# Altium PCB Banker_VHDCI_2_EDGE _BUF.PCBDOC (part 2 of 2)
Units mm, origin at the board's own origin, x right, y up, seen from the top; angles counter-clockwise.
Board outline 45 x 72.8 mm, 2 copper layers (Top, Bot), stack 1.571 mm thick; 106 components, 110 nets, 426 pads, 220 vias.
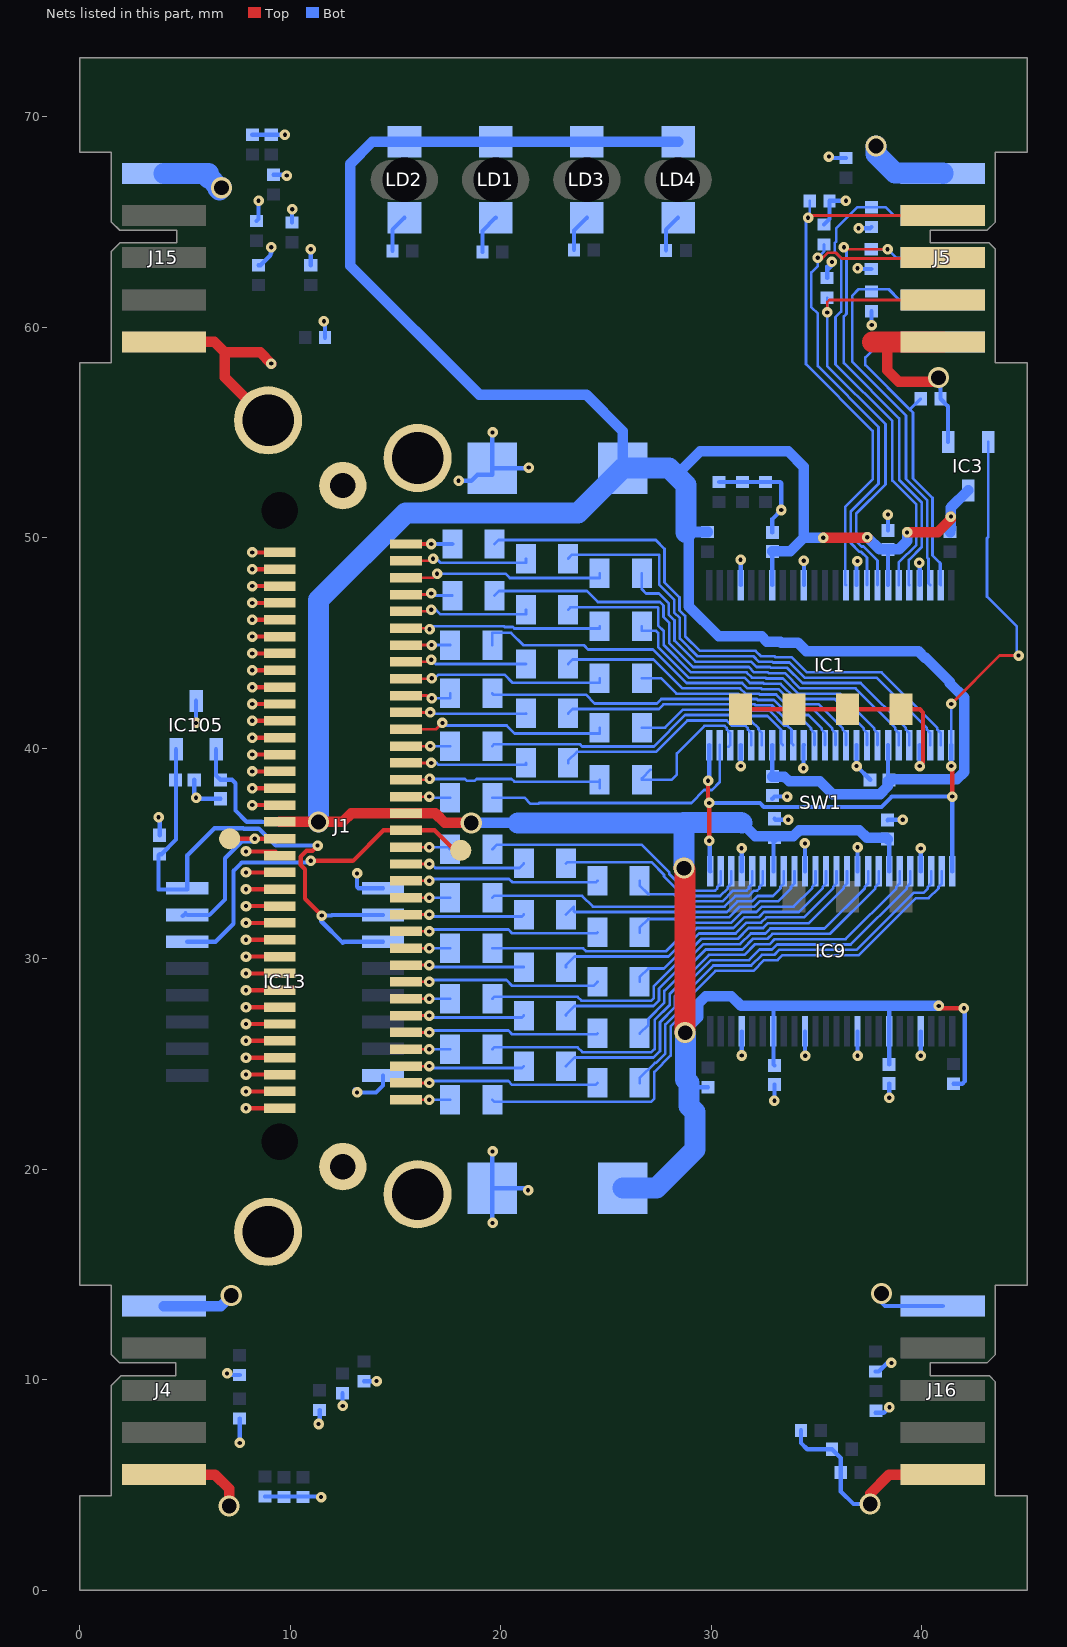
[diagram p2: the nets of this part, all layers, seen from the top]

## Via types
v1: diameter 0.5, hole 0.2, Top to Bot, tented both sides, 209 vias
v2: diameter 1, hole 0.7, Top to Bot, tented both sides, 11 vias

## Nets (pads, with @x,y where several pads share a name; then routed paths per layer and width w, separated by ;. In a path a pad name is that pad's centre, name@x,y a point inside that pad or via, vN(x,y) a via of type N, cw(c..) or ccw(c..) an arc to the next point about the centre after c; other vN are vias at no path point) (continued)
EDGE3_DIO1: IC1.14 J5.2 R23.1 | length 26.6
  Top w0.127: v1(34.6,65.2) 34.7,65.3 J5.2@41,65.3
  Bot w0.127: R23.1@34.681,66 34.681,65.262 34.502,65.083 34.502,58.243 37.67,55.076 37.67,52.77 36.371,51.471 36.371,47.779 IC1.14@36.4,47.75
EDGE3_DIO2: IC1.16 J5.3 R25.1 | length 24.9
  Top w0.127: v1(35.06,63.3) 35.1,63.26 35.267,63.26 35.548,63.541 35.912,63.541 36.193,63.26 40.96,63.26 J5.3@41,63.3
  Bot w0.127: R25.1@35.358,63.93 35.358,63.599 v1(35.06,63.3) 35.06,62.9 34.756,62.597 34.756,60.944 35.06,60.64 35.06,58.148 37.946,55.262 37.946,52.562 36.625,51.242 36.625,49.737 37.032,49.33 37.125,49.33 37.4,49.055 IC1.16@37.4,47.75
EDGE3_DIO3: IC1.17 J5.4 R27.1 | length 21.9
  Top w0.127: v1(35.505,60.7) 35.505,61.184 35.611,61.289 40.989,61.289 J5.4@41,61.3
  Bot w0.127: R27.1@35.505,61.4 v1(35.505,60.7) 35.505,58.165 38.273,55.397 38.273,52.53 36.879,51.136 36.879,49.842 37.137,49.584 37.23,49.584 37.9,48.915 IC1.17@37.9,47.75
EDGE3_DIO4: IC1.19 J5.7 R29.1 | length 24.8
  Bot w0.127: IC1.19@38.901,47.751 38.901,48.817 39.744,49.661 39.744,51.575 38.6,52.719 38.6,55.532 35.9,58.232 35.9,60.472 36.171,60.742 36.171,63.282 35.859,63.594 35.859,63.988 35.94,64.069 35.94,64.7 36.941,65.7 R29.1@37.607,65.7 38.273,65.7 38.673,65.3 J5.7@41,65.3
EDGE3_DIO5: IC1.20 J5.8 R31.1 | length 23.6
  Top w0.127: v1(36.3,63.8) 36.3,63.795 36.395,63.7 v1(38.375,63.7)
  Bot w0.127: v1(36.3,63.8) 36.425,63.675 36.425,60.637 36.295,60.507 36.295,58.3 38.927,55.668 38.927,52.751 39.998,51.68 39.998,49.556 39.382,48.939 39.382,47.769 IC1.20@39.4,47.75 ; R31.1@37.6,63.7 v1(38.375,63.7) 38.775,63.3 J5.8@41,63.3
EDGE3_DIO6: IC1.22 J5.9 R33.1 | length 19.9
  Bot w0.127: IC1.22@40.4,47.75 40.316,47.835 40.316,48.992 40.252,49.055 40.252,51.785 39.254,52.783 39.254,55.803 36.689,58.368 36.689,61.489 37,61.8 38.43,61.8 38.93,61.3 J5.9@41,61.3
EDGE3_DIO7: IC1.23 J5.10 R34.1 | length 18.1
  Bot w0.127: R34.1@39.95,56.6 39.45,56.1 39.42,56.1 ; J5.10@41,59.3 38.051,59.3 37.32,58.568 37.32,58.2 39.42,56.1 ; 39.42,56.1 39.581,55.939 39.581,52.819 40.506,51.894 40.506,49.16 40.849,48.817 ; 40.849,48.817 40.9,48.767 IC1.23@40.9,47.75 40.849,47.801 40.849,48.817
GND: C1.1 C2.1 C3.2 C4.1 C5.1 C6.1 C7.2 C8.1 C9.1 C10.1 C37.1 C297.1 C298.1 IC1.4 IC1.10 IC1.15 IC1.21 IC1.28 IC1.34 IC1.39 IC1.45 IC3.1 IC9.4 IC9.10 IC9.15 IC9.21 IC9.28 IC9.34 IC9.39 IC9.45 IC13.1 IC13.8 IC105.3 J1.35 J1.36 J1.37 J1.38 J1.39 J1.40 J1.41 J1.42 J1.43 J1.44 J1.45 J1.46 J1.47 J1.48 J1.49 J1.50 J1.53 J1.54 J1.55 J1.56 J1.57 J1.58 J1.59 J1.60 J1.61 J1.62 J1.63 J1.64 J1.65 J1.66 J1.67 J1.68 J1.69 J1.70 J1.71 J1.72 J1.73 J1.74 J4.5 J4.6 J5.5 J5.6 J15.5 J15.6 J16.5 J16.6 R3.2 R4.2 R5.2 R6.2 R7.2 R8.2 R9.2 R10.2 R11.2 R12.2 R13.2 R14.2 R15.2 R16.2 R17.2 R18.2 R19.2 R20.2 R21.2 R22.2 R23.2 R24.2 R25.2 R26.2 R27.2 R28.2 R29.2 R30.2 R31.2 R32.2 R33.2 R34.2 SW1.5 SW1.6 SW1.7 SW1.8 | length 173.7
  Top w0.2: v1(7.9,22.9) J1.35@9.5,22.9 ; v1(7.9,23.7) J1.36@9.5,23.7 ; v1(7.9,24.5) J1.37@9.5,24.5 ; v1(7.9,25.3) J1.38@9.5,25.3 ; v1(7.9,26.1) J1.39@9.5,26.1 ; v1(7.9,26.9) J1.40@9.5,26.9 ; v1(7.9,27.7) J1.41@9.5,27.7 ; v1(7.9,28.5) J1.42@9.5,28.5 ; v1(7.9,29.3) J1.43@9.5,29.3 ; v1(7.9,30.1) J1.44@9.5,30.1 ; v1(7.9,30.9) J1.45@9.5,30.9 ; v1(7.9,31.7) J1.46@9.5,31.7 ; v1(7.9,32.5) J1.47@9.5,32.5 ; v1(7.9,33.3) J1.48@9.5,33.3 ; v1(7.9,34.1) J1.49@9.5,34.1 ; v1(7.9,35.1) 9.3,35.1 J1.50@9.5,34.9 ; v1(8.2,37.3) J1.53@9.5,37.3 ; v1(8.2,38.1) J1.54@9.5,38.1 ; v1(8.2,38.9) J1.55@9.5,38.9 ; v1(8.2,39.7) J1.56@9.5,39.7 ; v1(8.2,40.5) J1.57@9.5,40.5 ; v1(8.2,41.3) J1.58@9.5,41.3 ; v1(8.2,42.1) J1.59@9.5,42.1 ; v1(8.2,42.9) J1.60@9.5,42.9 ; v1(8.2,43.7) J1.61@9.5,43.7 ; v1(8.2,44.5) J1.62@9.5,44.5 ; v1(8.2,45.3) J1.63@9.5,45.3 ; v1(8.2,46.1) J1.64@9.5,46.1 ; v1(8.2,46.9) J1.65@9.5,46.9 ; v1(8.2,47.7) J1.66@9.5,47.7 ; v1(8.2,48.5) J1.67@9.5,48.5 ; v1(8.2,49.3) J1.68@9.5,49.3 ; SW1.8@31.39,41.85 39.91,41.85 40.06,41.7 40.06,39.31 v1(39.9,39.15)
  Top w0.5: J4.5@4,5.5 6.425,5.5 7.1,4.825 v2(7.1,4) ; J15.5@4,59.3 6.4,59.3 6.9,58.8 ; J1.71@8.95,55.575 6.9,57.625 6.9,58.8 ; v1(9.1,58.27) 8.57,58.8 6.9,58.8 ; v2(37.55,4.1) 37.55,4.594 38.455,5.5 J16.5@41,5.5 ; 38.35,58.91 38.35,57.95 38.9,57.4 v2@40.6,57.4
  Top w1: 37.659,59.3 J5.5@41,59.3
  Bot w0.2: v1(3.75,36.72) 3.8,36.67 C37.1@3.8,35.866 ; C298.1@5.441,38.5 5.441,37.741 v1(5.531,37.65) 5.582,37.6 C297.1@6.691,37.6 ; v1(5.531,41.2) IC105.3@5.531,42.25 ; v1(7,10.3) 7.07,10.23 R10.2@7.6,10.23 ; v1(7.6,7) R12.2@7.6,8.16 ; R19.2@8.2,69.14 R20.2@9.1,69.14 v1(9.746,69.14) ; R22.2@8.4,65.04 8.5,65.14 v1(8.5,66) ; R24.2@8.5,62.94 8.591,62.94 9.069,63.418 9.069,63.503 9.1,63.534 v1(9.1,63.8) ; R16.2@8.8,4.46 11.437,4.46 v1(11.467,4.43) ; R26.2@9.2,67.24 9.796,67.24 v1(9.836,67.2) ; R28.2@10.081,64.97 10.081,65.581 v1(10.1,65.6) ; R30.2@10.975,62.94 v1(10.975,63.7) ; v1(11.347,7.9) 11.4,7.953 R6.2@11.4,8.56 ; v1(11.6,60.282) 11.655,60.227 R32.2@11.655,59.5 ; R4.2@12.488,9.36 12.488,8.768 v1(12.5,8.756) ; v1@13.05,23.775 v1(13.175,23.65) 14.08,23.65 14.411,23.981 IC13.8@14.411,24.457 ; v1(13.175,34.05) 13.175,33.42 13.249,33.347 IC13.1@14.411,33.347 ; R3.2@13.5,9.93 14.09,9.93 v1(14.1,9.94) ; v1(18,52.7) 18.6,52.7 18.89,52.99 19.6,52.99 C3.2@19.6,53.3 ; v1(19.609,17.45) 19.6,17.46 C7.2@19.6,19.1 ; v1(19.609,20.85) 19.6,20.841 C7.2@19.6,19.1 ; v1(19.609,55) 19.6,54.991 C3.2@19.6,53.3 ; v1(21.3,19) 21.2,19.1 C7.2@19.6,19.1 ; v1(21.331,53.33) 21.301,53.3 C3.2@19.6,53.3 ; R5.2@30.376,52.64 R7.2@31.476,52.64 R9.2@32.576,52.64 33.273,52.64 33.326,52.587 v1(33.326,51.315) 32.9,50.889 C2.1@32.9,50.25 ; v1(31.39,48.951) 31.4,48.941 IC1.4@31.4,47.75 ; v1(31.4,39.15) IC1.45@31.4,40.15 ; v1(31.442,35.25) 31.446,35.246 31.446,34.154 IC9.28@31.45,34.15 ; v1(31.45,25.403) IC9.21@31.45,26.55 ; C9.1@32.9,37.6 33,37.7 v1(33.6,37.7) ; v1(33,23.25) C10.1@33,24.03 ; C8.1@33,36.65 33.05,36.6 v1(33.66,36.6) ; R11.2@34.26,7.6 34.26,7 34.56,6.7 R17.2@35.73,6.7 36.15,6.28 R18.2@36.15,5.6 36.15,4.7 36.75,4.1 v2(37.55,4.1) ; v1(34.375,39.05) 34.387,39.063 34.387,40.138 IC1.39@34.4,40.15 ; v1(34.39,48.9) 34.4,48.89 IC1.10@34.4,47.75 ; IC9.15@34.45,26.55 34.45,25.403 v1(34.463,25.39) ; IC9.34@34.45,34.15 v1(34.45,35.475) ; R25.2@35.358,64.87 35.621,65.133 R23.2@35.621,66 v1(36.397,66) ; R27.2@35.505,62.34 35.505,62.884 35.59,62.8 35.73,62.94 v1(35.73,63.1) ; v1(35.59,68.1) 35.65,68.04 R21.2@36.397,68.04 ; IC1.34@36.9,40.15 v1(36.9,39.15) C4.1@37.55,38.5 ; IC1.15@36.9,47.75 36.9,48.849 v1(36.941,48.89) ; v1(36.95,25.39) IC9.10@36.95,26.55 ; IC9.39@36.95,34.15 v1(36.95,35.3) ; v1(36.95,62.8) 36.99,62.76 R31.2@37.6,62.76 ; v1(37,64.7) 37.547,64.7 R29.2@37.607,64.76 ; R33.2@37.607,60.76 37.607,60.112 v1(37.619,60.1) ; R15.2@37.8,8.43 38.191,8.43 v1(38.461,8.7) ; R13.2@37.8,10.4 37.958,10.4 38.358,10.8 v1(38.561,10.8) ; v2(38.091,14.1) 38.091,13.667 38.258,13.5 J16.6@41,13.5 ; C6.1@38.375,36.58 38.395,36.6 v1(39.1,36.6) ; v1(38.39,51.1) 38.4,51.09 C1.1@38.4,50.341 ; v1(38.45,23.4) C5.1@38.45,24.08 ; v1(39.875,48.81) 39.9,48.785 IC1.21@39.9,47.75 ; v1(39.9,39.15) IC1.28@39.9,40.15 ; v1(39.95,25.39) IC9.4@39.95,26.55 ; IC9.45@39.95,34.15 v1(39.95,35.242) ; v2@40.6,57.4 40.89,57.11 R34.2@40.89,56.6 41.25,56.24 IC3.1@41.25,54.55
  Bot w0.5: J4.6@4,13.5 6.7,13.5 v2(7.2,14)
  Bot w1: J15.6@4,67.3 6.123,67.3 6.123,67.077 6.18,67.077 6.577,66.68 6.577,66.583 6.637,66.523 v2(6.737,66.623) ; v2(37.828,68.6) 37.828,68.223 38.731,67.32 41,67.32 J5.6@41,67.3
  other v2: 40.791,57.6
NetJ1_1: J1.1 R126.2 | length 2.1
  Top w0.127: J1.1@15.5,23.3 v1(16.6,23.3)
  Bot w0.127: v1(16.6,23.3) R126.2@17.6,23.3
NetJ1_2: J1.2 R127.2 | length 9.2
  Top w0.127: J1.2@15.5,24.1 v1(16.6,24.1)
  Bot w0.127: v1(16.6,24.1) 16.701,24.1 16.791,24.191 20.365,24.191 20.546,24.01 24.509,24.01 R127.2@24.6,24.1
NetJ1_3: J1.3 R128.2 | length 5.7
  Top w0.127: J1.3@15.5,24.9 v1(16.6,24.9)
  Bot w0.127: v1(16.6,24.9) 16.701,24.9 16.791,24.81 21.009,24.81 R128.2@21.1,24.9
NetJ1_4: J1.4 R129.2 | length 2.1
  Top w0.127: J1.4@15.5,25.7 v1(16.6,25.7)
  Bot w0.127: v1(16.6,25.7) R129.2@17.6,25.7
NetJ1_5: J1.5 R130.2 | length 9.2
  Top w0.127: J1.5@15.5,26.5 v1(16.6,26.5)
  Bot w0.127: v1(16.6,26.5) 16.701,26.5 16.791,26.591 20.365,26.591 20.546,26.41 24.559,26.41 R130.2@24.6,26.45
NetJ1_6: J1.6 R131.2 | length 5.7
  Top w0.127: J1.6@15.5,27.3 v1(16.6,27.3)
  Bot w0.127: v1(16.6,27.3) 16.701,27.3 16.791,27.21 21.009,27.21 R131.2@21.1,27.3
NetJ1_7: J1.7 R132.2 | length 2.1
  Top w0.127: J1.7@15.5,28.1 v1(16.6,28.1)
  Bot w0.127: v1(16.6,28.1) R132.2@17.6,28.1
NetJ1_8: J1.8 R135.2 | length 9.3
  Top w0.127: J1.8@15.5,28.9 v1(16.6,28.9)
  Bot w0.127: v1(16.6,28.9) 16.701,28.9 16.791,28.991 20.265,28.991 20.546,28.71 24.409,28.71 R135.2@24.6,28.9
NetJ1_9: J1.9 R137.2 | length 5.6
  Top w0.127: J1.9@15.5,29.7 v1(16.6,29.7)
  Bot w0.127: v1(16.6,29.7) 16.701,29.7 16.791,29.61 21.09,29.61 R137.2@21.1,29.6
NetJ1_10: J1.10 R139.2 | length 2.1
  Top w0.127: J1.10@15.5,30.5 v1(16.6,30.5)
  Bot w0.127: v1(16.6,30.5) R139.2@17.6,30.5
NetJ1_11: J1.11 R141.2 | length 9.2
  Top w0.127: J1.11@15.5,31.3 v1(16.6,31.3)
  Bot w0.127: v1(16.6,31.3) 16.701,31.3 16.791,31.391 20.365,31.391 20.546,31.21 24.559,31.21 R141.2@24.6,31.25
NetJ1_12: J1.12 R143.2 | length 5.7
  Top w0.127: J1.12@15.5,32.1 v1(16.6,32.1)
  Bot w0.127: v1(16.6,32.1) 16.701,32.1 16.791,32.01 21.009,32.01 R143.2@21.1,32.1
NetJ1_13: J1.13 R145.2 | length 2.1
  Top w0.127: J1.13@15.5,32.9 v1(16.6,32.9)
  Bot w0.127: v1(16.6,32.9) R145.2@17.6,32.9
NetJ1_14: J1.14 R147.2 | length 9.2
  Top w0.127: J1.14@15.5,33.7 v1(16.6,33.7)
  Bot w0.127: v1(16.6,33.7) 16.701,33.7 16.791,33.791 20.39,33.791 20.546,33.635 24.535,33.635 R147.2@24.6,33.7
NetJ1_15: J1.15 R149.2 | length 5.8
  Top w0.127: J1.15@15.5,34.5 v1(16.6,34.5)
  Bot w0.127: v1(16.6,34.5) 16.701,34.5 16.891,34.31 20.884,34.31 R149.2@21.1,34.525
NetJ1_16: J1.16 R151.2 | length 2.1
  Top w0.127: J1.16@15.5,35.3 v1(16.6,35.3)
  Bot w0.127: v1(16.6,35.3) 17.5,35.3 R151.2@17.6,35.2
NetJ1_19: J1.19 R153.2 | length 2.1
  Top w0.127: J1.19@15.5,37.7 v1(16.6,37.7)
  Bot w0.127: v1(16.6,37.7) 16.65,37.65 R153.2@17.6,37.65
NetJ1_20: J1.20 R155.2 | length 9.7
  Top w0.127: J1.20@15.5,38.5 v1@16.622,38.5
  Bot w0.127: v1(16.622,38.55) 16.632,38.541 18.306,38.541 18.394,38.452 18.759,38.452 18.848,38.541 20.515,38.541 20.646,38.41 R155.2@24.7,38.41 ; R155.2@24.7,38.1 R155.2@24.7,38.41 ; R155.2@24.7,38.5 R155.2@24.7,38.41
NetJ1_21: J1.21 R157.2 | length 5.8
  Top w0.127: J1.21@15.5,39.3 v1@16.7,39.3
  Bot w0.127: v1(16.7,39.3) 16.955,39.3 17.046,39.21 21.2,39.21 R157.2@21.2,39.3
NetJ1_22: J1.22 R159.2 | length 2.1
  Top w0.127: J1.22@15.5,40.1 v1(16.65,40.1)
  Bot w0.127: v1(16.65,40.1) R159.2@17.6,40.1
NetJ1_23: J1.23 R161.2 | length 9.8
  Top w0.127: J1.23@15.5,40.9 16.927,40.9 v1(17.231,41.204)
  Bot w0.127: v1(17.231,41.204) 17.358,41.077 20.279,41.077 20.66,40.696 24.7,40.696 R161.2@24.7,40.975
NetJ1_24: J1.24 R163.2 | length 5.7
  Top w0.127: J1.24@15.5,41.7 v1(16.651,41.7)
  Bot w0.127: v1(16.651,41.7) 16.715,41.636 17.039,41.636 17.048,41.644 18.891,41.644 18.9,41.636 21.2,41.636 R163.2@21.2,41.65
NetJ1_25: J1.25 R165.2 | length 2.4
  Top w0.127: J1.25@15.5,42.5 16.494,42.5 16.622,42.372 v1(16.723,42.372)
  Bot w0.127: v1(16.723,42.372) 17.6,42.372 R165.2@17.6,42.6
NetJ1_26: J1.26 R171.2 | length 9.6
  Top w0.127: J1.26@15.5,43.3 v1@16.723,43.3
  Bot w0.127: v1(16.723,43.325) 16.881,43.325 17.046,43.491 20.186,43.491 20.567,43.11 24.7,43.11 R171.2@24.7,43.325
NetJ1_27: J1.27 R173.2 | length 5.8
  Top w0.127: J1.27@15.5,44.1 v1@16.7,44.1
  Bot w0.127: v1(16.7,44.2) 16.9,44 R173.2@21.2,44
NetJ1_28: J1.28 R175.2 | length 2.1
  Top w0.127: J1.28@15.5,44.9 v1(16.715,44.9)
  Bot w0.127: v1(16.715,44.9) R175.2@17.6,44.9
NetJ1_29: J1.29 R177.2 | length 9.4
  Top w0.127: J1.29@15.5,45.7 v1@16.622,45.7
  Bot w0.127: v1(16.622,45.65) 16.772,45.8 20.144,45.8 20.19,45.755 20.576,45.755 20.646,45.685 24.7,45.685 R177.2@24.7,45.8
NetJ1_30: J1.30 R179.2 | length 6
  Top w0.127: J1.30@15.5,46.5 v1@16.7,46.5
  Bot w0.127: v1(16.7,46.575) 16.931,46.575 17.146,46.36 21.2,46.36 R179.2@21.2,46.575
NetJ1_31: J1.31 R181.2 | length 2.2
  Top w0.127: J1.31@15.5,47.3 v1@16.7,47.3
  Bot w0.127: v1(16.7,47.35) 16.8,47.25 R181.2@17.7,47.25
NetJ1_32: J1.32 R183.2 | length 9.6
  Top w0.127: J1.32@15.5,48.1 16.786,48.1 v1(16.977,48.29)
  Bot w0.127: v1(16.977,48.29) 20.228,48.29 20.431,48.087 24.7,48.087 R183.2@24.7,48.3
NetJ1_33: J1.33 R185.2 | length 6
  Top w0.127: J1.33@15.5,48.9 v1@16.786,48.9
  Bot w0.127: v1(16.786,49) 16.956,49 17.146,48.81 21.2,48.81 R185.2@21.2,49
NetJ1_34: J1.34 R187.2 | length 2.2
  Top w0.2: J1.34@15.5,49.7 v1(16.7,49.7)
  Bot w0.2: v1(16.7,49.7) R187.2@17.7,49.7
NetLD1_1: LD1.1 R35.2 | length 1.9
  Bot w0.2: R35.2@19.13,63.575 19.13,64.572 LD1.1@19.758,65.2
NetLD2_1: LD2.1 R51.2 | length 1.8
  Bot w0.2: R51.2@14.855,63.625 14.855,64.63 LD2.1@15.425,65.2
NetLD3_1: LD3.1 R36.2 | length 1.8
  Bot w0.2: R36.2@23.48,63.675 23.48,64.588 LD3.1@24.092,65.2
NetLD4_1: LD4.1 R37.2 | length 1.8
  Bot w0.2: R37.2@27.855,63.65 27.855,64.63 LD4.1@28.425,65.2
P3V3: C37.2 C298.2 IC13.2 IC13.3 IC13.16 IC105.2 | length 27.9
  Top w0.2: v1(11.3,35.375) 11.052,35.127 10.777,35.127 10.498,34.848 10.498,34.453 10.7,34.251 10.7,32.85 v1(11.5,32.05)
  Bot w0.2: IC105.2@4.581,39.95 4.581,35.658 3.889,34.966 C37.2@3.8,34.966 3.75,34.916 3.75,33.295 IC13.16@5.111,33.295 ; IC13.16@5.111,33.347 5.111,34.911 6.4,36.2 7.773,36.2 7.796,36.177 8.51,36.177 9.312,35.375 v1(11.3,35.375) ; IC13.3@14.411,30.807 12.551,30.807 12.5,30.755 11.475,31.781 11.475,32.025 v1(11.5,32.05) 11.959,32.05 11.985,32.077 IC13.2@14.411,32.077
P5V0_VHDCI1: C1.2 C2.2 C3.1 C4.2 C5.2 C6.2 C7.1 C8.2 C9.2 C10.2 C297.2 IC1.7 IC1.18 IC1.31 IC1.42 IC3.3 IC9.7 IC9.18 IC9.31 IC9.42 IC105.1 J1.18 J1.52 LD1.2 LD2.2 LD3.2 LD4.2 R1.1 R2.1 R90.1 R91.1 | length 220.3
  Top w0.2: v1(40.805,27.756) 40.911,27.65 v1(42,27.65)
  Top w0.5: J1.52@9.5,36.5 v2(11.347,36.5) 12.5,36.5 12.9,36.9 16.9,36.9 17.35,36.45 v2@18.394,36.45 ; v1(35.32,50) 37.4,50 37.413,50.013 v1(37.413,50.025) ; v1(39.304,50.25) 40.75,50.25 41.382,50.882 v1(41.382,51)
  Top w1: v2(28.7,34.3) 28.763,34.237 v2(28.763,26.487)
  Bot w0.2: IC105.1@6.481,39.95 6.481,38.709 C297.2@6.691,38.5 7.235,38.5 7.4,38.335 7.4,37.035 7.931,36.504 8.646,36.504 8.65,36.5 v2(11.347,36.5) ; 28.777,24.262 28.94,24.099 29.146,23.893 R90.1@29.849,23.893 ; C9.2@32.9,38.65 IC1.42@32.9,40.15 ; IC1.7@32.9,47.75 C2.2@32.9,49.35 ; IC9.31@32.95,34.15 32.95,35.7 C8.2@33,35.75 ; C10.2@33,24.93 32.95,24.98 IC9.18@32.95,26.55 32.95,27.706 33,27.756 ; C6.2@38.375,35.68 38.45,35.605 IC9.42@38.45,34.15 ; 38.4,27.756 38.45,27.706 IC9.7@38.45,26.55 C5.2@38.45,24.98 ; IC1.31@38.4,40.15 38.4,38.55 C4.2@38.45,38.5 ; IC1.18@38.4,47.75 C1.2@38.4,49.441 ; R91.1@41.5,24.06 41.92,24.06 42.037,24.177 42.037,27.613 v1(42,27.65)
  Bot w0.5: v2@18.394,36.45 v2(18.6,36.45) 20.823,36.45 ; C3.1@25.8,53.3 25.8,55.061 24.061,56.8 18.975,56.8 12.85,62.925 12.85,67.75 13.9,68.8 LD2.2@15.425,68.8 LD1.2@19.758,68.8 LD3.2@24.092,68.8 LD4.2@28.425,68.8 ; 28.364,52.928 28.364,52.985 29.477,54.098 29.885,54.098 29.887,54.1 33.659,54.1 34.4,53.359 34.4,50 ; v2(28.763,26.487) 28.763,26.622 29.373,27.232 29.373,27.86 29.74,28.227 30.956,28.227 31.427,27.756 33,27.756 38.4,27.756 v1(40.805,27.756) ; R2.1@29.825,50.27 28.82,50.27 28.8,50.25 28.933,50.117 28.933,46.731 30.347,45.316 32.389,45.316 32.643,45.062 33.284,45.062 33.326,45.02 34.108,45.02 34.512,44.616 35.01,44.616 35.023,44.604 39.844,44.604 40.148,44.3 40.185,44.3 41.333,43.153 41.333,43.088 42.027,42.394 42.027,38.891 41.66,38.523 38.51,38.523 38.51,38.44 38.39,38.44 38.39,38.187 38.016,37.813 35.763,37.813 35.153,38.423 33.7,38.423 33.473,38.65 C9.2@32.9,38.65 ; 31.45,36.45 32.09,35.81 32.94,35.81 C8.2@33,35.75 33.06,35.81 33.898,35.81 34.19,36.102 37.035,36.102 37.397,35.74 38.315,35.74 C6.2@38.375,35.68 ; C2.2@32.9,49.35 33.75,49.35 34.4,50 ; v1(35.32,50) 34.4,50 ; v1(37.413,50.025) 37.997,49.441 C1.2@38.4,49.441 38.901,49.441 39.304,49.844 v1(39.304,50.25) ; R1.1@41.35,50.27 41.3,50.32 41.382,50.402 v1(41.382,51) 41.382,51.432 IC3.3@42.2,52.25
  Bot w1: v2(11.347,36.5) 11.347,47.037 15.488,51.179 23.679,51.179 C3.1@25.8,53.3 27.992,53.3 28.364,52.928 28.8,52.492 28.8,50.25 ; 20.823,36.45 28.65,36.45 ; C7.1@25.8,19.1 27.39,19.1 29.226,20.936 29.226,22.728 28.94,23.013 28.94,24.099 ; v2(28.7,34.3) 28.7,36.4 28.65,36.45 ; v2(28.763,26.487) 28.777,26.473 28.777,24.262 ; 31.45,36.45 31.423,36.477 28.677,36.477 28.65,36.45
RESET: IC1.25 IC1.48 IC3.2 IC9.25 IC9.48 | length 40.8
  Top w0.127: v1(41.4,42.102) 43.698,44.4 v1(44.6,44.4)
  Top w0.2: v1(29.846,38.452) 29.846,37.254 29.9,37.2 v1(29.9,35.6) ; v1(41.4,39.15) 41.45,39.1 v1(41.45,37.7)
  Bot w0.127: IC1.25@41.4,40.15 v1(41.4,42.102) ; IC3.2@43.15,54.55 43.15,50.035 43.1,49.985 43.1,47.2 44.505,45.795 44.505,44.494 v1(44.6,44.4)
  Bot w0.2: v1(29.846,38.452) 29.9,38.506 IC1.48@29.9,40.15 ; v1(29.9,35.6) 29.925,35.575 29.925,34.175 IC9.25@29.95,34.15 ; v1(29.9,37.4) 32.309,37.4 32.496,37.213 38.091,37.213 38.578,37.7 v1(41.45,37.7) IC9.48@41.45,34.15 ; v1(41.4,39.15) IC1.25@41.4,40.15
VHDCI1_5V_DIO0: IC9.47 R126.1 | length 28.2
  Bot w0.127: R126.1@19.6,23.3 19.69,23.21 27.154,23.21 27.296,23.352 27.296,24.624 28.073,25.401 28.073,26.773 28.79,27.49 28.79,28.012 30.202,29.425 32.002,29.425 32.51,29.933 33.147,29.933 33.382,30.167 37.01,30.167 39.721,32.879 40.323,32.879 40.791,33.346 40.791,33.416 40.95,33.575 IC9.47@40.95,34.15
VHDCI1_5V_DIO1: IC9.46 R127.1 | length 19.6
  Bot w0.127: R127.1@26.6,24.1 26.6,24.325 27.326,25.052 27.364,25.052 27.819,25.506 27.819,26.878 28.536,27.595 28.536,28.118 30.097,29.679 31.897,29.679 32.405,30.187 32.992,30.187 33.227,30.421 36.905,30.421 39.616,33.133 40.077,33.133 40.29,33.346 40.29,33.416 40.45,33.575 IC9.46@40.45,34.15
VHDCI1_5V_DIO2: IC9.44 R128.1 | length 21.7
  Bot w0.127: R128.1@23.1,24.9 23.505,25.306 27.259,25.306 27.565,25.611 27.565,26.983 28.282,27.7 28.282,28.223 29.991,29.933 31.791,29.933 32.299,30.441 32.887,30.441 33.121,30.675 36.62,30.675 39.29,33.346 39.29,33.416 39.45,33.575 IC9.44@39.45,34.15
VHDCI1_5V_DIO3: IC9.43 R129.1 | length 24.5
  Bot w0.127: R129.1@19.6,25.7 19.69,25.791 23.654,25.791 23.885,25.56 27.154,25.56 27.311,25.716 27.311,27.089 28.028,27.806 28.028,28.328 29.886,30.187 31.582,30.187 32.09,30.695 32.781,30.695 33.016,30.929 36.374,30.929 38.791,33.346 38.791,33.416 38.95,33.575 IC9.43@38.95,34.15
VHDCI1_5V_DIO4: IC9.41 R130.1 | length 15.4
  Bot w0.127: R130.1@26.6,26.45 27.012,26.862 27.012,27.149 27.774,27.911 27.774,28.476 29.738,30.441 31.477,30.441 31.985,30.949 32.676,30.949 32.911,31.183 35.628,31.183 37.791,33.346 37.791,33.416 37.95,33.575 IC9.41@37.95,34.15
VHDCI1_5V_DIO5: IC9.40 R131.1 | length 17.9
  Bot w0.127: R131.1@23.1,27.3 23.1,27.344 23.511,27.756 27.259,27.756 27.52,28.016 27.52,28.581 29.633,30.695 31.372,30.695 31.88,31.203 32.571,31.203 32.806,31.437 35.382,31.437 37.29,33.346 37.29,33.416 37.45,33.575 IC9.40@37.45,34.15
VHDCI1_5V_DIO6: IC9.38 R132.1 | length 20.2
  Bot w0.127: R132.1@19.6,28.1 19.69,28.191 23.654,28.191 23.835,28.01 27.154,28.01 27.266,28.121 27.266,28.686 29.528,30.949 31.267,30.949 31.775,31.457 32.466,31.457 32.701,31.691 34.636,31.691 36.29,33.346 36.29,33.416 36.45,33.575 IC9.38@36.45,34.15
VHDCI1_5V_DIO7: IC9.37 R135.1 | length 12
  Bot w0.127: R135.1@26.6,28.9 26.6,29.125 27.012,29.537 27.757,29.537 29.423,31.203 31.161,31.203 31.669,31.711 32.361,31.711 32.615,31.965 34.409,31.965 35.791,33.346 35.791,33.416 35.95,33.575 IC9.37@35.95,34.15
VHDCI1_5V_DIO8: IC9.36 R137.1 | length 14.7
  Bot w0.127: R137.1@23.1,29.6 23.1,29.694 23.511,30.106 27.967,30.106 29.318,31.457 31.056,31.457 31.564,31.965 32.255,31.965 32.509,32.219 34.163,32.219 35.29,33.346 35.29,33.416 35.45,33.575 IC9.36@35.45,34.15
VHDCI1_5V_DIO9: IC9.35 R139.1 | length 17.4
  Bot w0.127: R139.1@19.6,30.5 19.609,30.491 23.915,30.491 24.046,30.36 27.861,30.36 29.212,31.711 30.951,31.711 31.459,32.219 32.15,32.219 32.404,32.473 33.917,32.473 34.791,33.346 34.791,33.416 34.95,33.575 IC9.35@34.95,34.15
VHDCI1_5V_DIO10: IC9.33 R141.1 | length 9.1
  Bot w0.127: R141.1@26.6,31.25 26.6,31.475 27.012,31.887 28.972,31.887 29.05,31.965 30.846,31.965 31.354,32.473 32.045,32.473 32.299,32.727 33.171,32.727 33.791,33.346 33.791,33.416 33.95,33.575 IC9.33@33.95,34.15
VHDCI1_5V_DIO11: IC9.32 R143.1 | length 11.9
  Bot w0.127: R143.1@23.1,32.1 23.472,32.473 23.472,32.258 23.511,32.219 30.741,32.219 31.249,32.727 31.94,32.727 32.194,32.981 32.925,32.981 33.291,33.346 33.291,33.416 33.45,33.575 IC9.32@33.45,34.15
VHDCI1_5V_DIO12: IC9.30 R145.1 | length 14.2
  Bot w0.127: R145.1@19.6,32.9 19.69,32.991 23.865,32.991 24.383,32.473 30.635,32.473 31.143,32.981 31.784,32.981 32.038,33.235 32.179,33.235 32.291,33.346 32.291,33.416 32.45,33.575 IC9.30@32.45,34.15
VHDCI1_5V_DIO13: IC9.29 R147.1 | length 6.9
  Bot w0.127: R147.1@26.6,33.7 26.6,33.475 27.011,33.064 28.241,33.064 28.578,32.727 30.53,32.727 31.038,33.235 31.679,33.235 31.79,33.346 31.79,33.416 31.95,33.575 IC9.29@31.95,34.15
VHDCI1_5V_DIO14: IC9.27 R149.1 | length 9.5
  Bot w0.127: R149.1@23.1,34.525 23.165,34.591 27.154,34.591 27.755,33.989 27.755,33.909 28.683,32.981 30.425,32.981 30.79,33.346 30.79,33.416 30.95,33.575 IC9.27@30.95,34.15
VHDCI1_5V_DIO15: IC9.26 R151.1 | length 12.6
  Bot w0.127: R151.1@19.6,35.2 19.816,35.416 26.688,35.416 28.009,34.094 28.009,34.014 28.789,33.235 30.179,33.235 30.291,33.346 30.291,33.416 30.45,33.575 IC9.26@30.45,34.15
VHDCI1_5V_DIO16: IC1.47 R153.1 | length 13.1
  Bot w0.127: R153.1@19.6,37.65 21.127,37.65 21.418,37.36 21.782,37.36 21.823,37.4 29.052,37.4 29.664,38.011 30.029,38.011 30.4,38.383 IC1.47@30.4,40.15
VHDCI1_5V_DIO17: IC1.46 R155.1 | length 7.4
  Bot w0.127: R155.1@27.112,38.981 26.7,38.569 R155.1@26.7,38.5 28.113,38.5 28.363,38.751 28.363,39.758 29.671,41.066 30.629,41.066 30.74,40.954 30.74,40.885 30.9,40.725 IC1.46@30.9,40.15 IC1.46@30.814,40.064
VHDCI1_5V_DIO18: IC1.44 R157.1 | length 10.5
  Bot w0.127: R157.1@23.2,39.3 23.2,39.419 23.611,39.831 27.375,39.831 28.864,41.32 30.734,41.32 30.988,41.066 31.629,41.066 31.74,40.954 31.74,40.885 31.9,40.725 IC1.44@31.9,40.15
VHDCI1_5V_DIO19: IC1.43 R159.1 | length 14.5
  Bot w0.127: R159.1@19.6,40.1 19.691,40.191 23.754,40.191 23.86,40.085 27.269,40.085 28.759,41.574 30.839,41.574 31.093,41.32 31.734,41.32 31.776,41.278 31.917,41.278 32.241,40.954 32.241,40.885 32.4,40.725 IC1.43@32.4,40.15
VHDCI1_5V_DIO20: IC1.41 R161.1 | length 8.1
  Bot w0.127: R161.1@26.7,40.975 27.801,40.975 28.653,41.828 30.945,41.828 31.199,41.574 31.839,41.574 31.881,41.532 32.663,41.532 33.313,40.881 33.313,40.237 IC1.41@33.4,40.15
VHDCI1_5V_DIO21: IC1.40 R163.1 | length 12.1
  Bot w0.127: R163.1@23.2,41.65 23.416,41.866 27.517,41.866 27.733,42.082 31.05,42.082 31.304,41.828 31.945,41.828 31.986,41.786 32.768,41.786 33.488,41.066 33.629,41.066 33.814,40.881 33.814,40.237 IC1.40@33.9,40.15
VHDCI1_5V_DIO22: IC1.38 R165.1 | length 16.9
  Bot w0.127: R165.1@19.6,42.6 19.66,42.541 24.04,42.541 24.461,42.12 27.412,42.12 27.628,42.336 31.155,42.336 31.409,42.082 32.05,42.082 32.092,42.04 32.873,42.04 33.593,41.32 34.375,41.32 34.74,40.954 34.74,40.885 34.9,40.725 IC1.38@34.9,40.15
VHDCI1_5V_DIO23: IC1.37 R171.1 | length 10.4
  Bot w0.127: R171.1@26.7,43.325 27.607,43.325 28.343,42.59 31.26,42.59 31.514,42.336 32.155,42.336 32.197,42.294 32.979,42.294 33.699,41.574 34.621,41.574 35.241,40.954 35.241,40.885 35.4,40.725 IC1.37@35.4,40.15
VHDCI1_5V_DIO24: IC1.36 R173.1 | length 14.9
  Bot w0.127: R173.1@23.2,44 23.416,44.216 27.254,44.216 28.626,42.844 31.365,42.844 31.619,42.59 32.26,42.59 32.302,42.548 33.084,42.548 33.804,41.828 34.867,41.828 35.74,40.954 35.74,40.885 35.9,40.725 IC1.36@35.9,40.15
VHDCI1_5V_DIO25: IC1.35 R175.1 | length 20
  Bot w0.127: R175.1@19.6,44.9 19.6,45.48 20.492,45.48 21.081,44.891 23.95,44.891 24.155,44.686 27.236,44.686 28.824,43.098 31.471,43.098 31.725,42.844 32.365,42.844 32.407,42.802 33.189,42.802 33.909,42.082 35.113,42.082 36.241,40.954 36.241,40.885 36.4,40.725 IC1.35@36.4,40.15
VHDCI1_5V_DIO26: IC1.33 R177.1 | length 13.9
  Bot w0.127: R177.1@26.7,45.8 26.7,45.575 27.375,45.575 27.49,45.46 27.49,44.791 28.929,43.352 31.576,43.352 31.83,43.098 32.471,43.098 32.513,43.056 33.294,43.056 34.014,42.336 35.859,42.336 37.241,40.954 37.241,40.885 37.4,40.725 IC1.33@37.4,40.15
VHDCI1_5V_DIO27: IC1.32 R179.1 | length 18.7
  Bot w0.127: R179.1@23.2,46.575 23.315,46.691 27.45,46.691 27.476,46.664 27.476,45.833 27.744,45.566 27.744,44.897 29.034,43.606 31.681,43.606 31.935,43.352 32.576,43.352 32.618,43.31 33.399,43.31 34.119,42.59 36.105,42.59 37.74,40.954 37.74,40.885 37.9,40.725 IC1.32@37.9,40.15
VHDCI1_5V_DIO28: IC1.30 R181.1 | length 23.6
  Bot w0.127: R181.1@19.7,47.25 19.916,47.466 24.09,47.466 24.611,46.945 27.555,46.945 27.73,46.77 27.73,46.233 27.998,45.966 27.998,45.002 29.139,43.86 31.786,43.86 32.04,43.606 32.681,43.606 32.723,43.564 33.505,43.564 34.225,42.844 36.851,42.844 38.741,40.954 38.741,40.885 38.9,40.725 IC1.30@38.9,40.15
VHDCI1_5V_DIO29: IC1.29 R183.1 | length 17.8
  Bot w0.127: R183.1@26.7,48.3 26.7,47.55 26.9,47.35 27.509,47.35 27.984,46.875 27.984,46.338 28.252,46.071 28.252,45.107 29.245,44.114 31.891,44.114 32.145,43.86 32.786,43.86 32.828,43.818 33.61,43.818 34.33,43.098 37.097,43.098 39.241,40.954 39.241,40.885 39.4,40.725 IC1.29@39.4,40.15
VHDCI1_5V_DIO30: IC1.27 R185.1 | length 23.1
  Bot w0.127: R185.1@23.2,49 23.391,49.191 27.51,49.191 27.529,49.172 27.529,49.043 ; 27.528,49.043 27.528,47.769 28.238,47.059 28.238,46.443 28.506,46.176 28.506,45.212 29.35,44.368 31.997,44.368 32.251,44.114 32.891,44.114 32.933,44.072 33.715,44.072 34.435,43.352 37.843,43.352 40.24,40.954 40.24,40.885 40.4,40.725 IC1.27@40.4,40.15
VHDCI1_5V_DIO31: IC1.26 R187.1 | length 27.6
  Bot w0.127: R187.1@19.7,49.7 19.89,49.891 27.364,49.891 27.783,49.472 27.783,48.938 ; 27.782,48.938 27.782,47.874 28.492,47.164 28.492,46.548 28.76,46.281 28.76,45.317 29.455,44.622 32.102,44.622 32.356,44.368 32.997,44.368 33.039,44.326 33.82,44.326 34.54,43.606 38.089,43.606 40.741,40.954 40.741,40.885 40.9,40.725 IC1.26@40.9,40.15
VHDCI1_SCL: B11.1 IC13.14 J1.17 | length 17
  Top w0.2: v1(10.975,34.65) 12.975,34.65 14.425,36.1 J1.17@15.5,36.1 16.85,36.1 17.8,35.15 B11.1@18.1,35.15
  Bot w0.2: IC13.14@5.111,30.807 6.445,30.807 7.3,31.662 7.3,34.175 7.702,34.577 10.902,34.577 v1(10.975,34.65)
VHDCI1_SDA: B12.1 IC13.15 J1.51 | length 8.4
  Top w0.2: B12.1@7.125,35.7 v1(8.313,35.7) J1.51@9.5,35.7
  Bot w0.2: IC13.15@4.898,32.025 IC13.15@5.03,32.157 ; IC13.15@5.111,32.077 6.158,32.077 6.9,32.819 6.9,34.775 7.702,35.577 8.189,35.577 v1(8.313,35.7)
pads on no net: IC13.9 IC13.10 IC13.11 IC13.12 IC13.13 J1.75 LD1.3 LD2.3 LD3.3 LD4.3

## Polygon pours and split planes (outlines as drawn)
GND on Top "Top-GND" (solid, remove dead copper, shelved, pour order 0): 0.2,72.6 44.8,72.6 44.8,68.5 43.305,68.5 43.3,68.495 43.3,58.1 44.8,58.1 44.8,0.2 0.2,0.2
GND on Bot "Bot-GND" (solid, remove dead copper, shelved, pour order 2): 0,72.8 45,72.8 45,0 44.9,0.1 0,0.1

## Keep-outs
Top:
  lines w0.1: 0,0.9 33.7,0.9 ; 0,71.9 33.7,71.9 ; 11.227,0.9 44.927,0.9 ; 11.227,71.9 44.927,71.9
Bot:
  lines w0.1: 0,2.65 33.35,2.65 ; 0,70.15 33.65,70.15 ; 11.227,2.65 44.577,2.65 ; 11.227,70.15 44.877,70.15
KeepOutLayer:
  lines w0.1: 0,43.8 0,14.5 ; 0,53.8 0,58.3 5.7,58.3 ; 1.5,4.5 0,4.5 ; 3.77,6.254 4.37,6.254 ; 5.7,60.1 5.7,60.5 ; 5.8,62.2 5.8,62.6 ; 5.8,64 5.8,64.5 ; 5.9,66.2 5.9,66.4 ; 6,4.5 0,4.5 ; 6,6.157 6,6.757 ; 6,8.4 6,8.8 ; 6,10.4 6,10.8 ; 6,12.3 6,12.8 ; 7.6,68.3 0,68.3 ; 38.8,4.5 45,4.5 ; 39,10.2 39,10.8 ; 39,12.2 39,12.8 ; 39,14.5 45,14.5 45,43.8 ; 39,58.3 45,58.3 45,53.8 ; 39,60 39,60.5 ; 39,62.1 39,62.6 ; 39,64 39,64.5 ; 39.01,6.157 39.01,6.757 ; 39.01,8.191 39.01,8.791 ; 39.01,66.043 39.01,66.643 ; 0,0 0,4.5 ; 0,0 0,0 ; 0,0 45,0 ; 0,4.5 0,0.1 0.1,0 45,0 ; 0,14.5 0,14.5 ; 0,14.5 6,14.5 ; 0,68.3 0,72.8 ; 0,68.3 0,68.3 ; 0,72.8 45,72.8 ; 0,72.8 0,72.8 ; 6,14.5 6,14.5 ; 39,68.3 45,68.3 45,72.8 ; 39,68.3 39,68.3 ; 45,0 45,4.5 ; 45,0 45,4.5 ; 45,43.8 45,43.8 ; 45,53.8 45,53.8 ; 45,72.8 45,72.8

## Silkscreen, mask and mechanical layers (free items; w line width, h text height)
TopOverlay:
  text "EDGE3" at 36.25,60.475 h1.52 r90
  text "EDGE1" at 9.925,59.8 h1.52 r90
  text "OUT0" at 16.15,59.425 h1.52 r90
  text "OUT1" at 20.55,59.425 h1.52 r90
  text "OUT2" at 24.95,59.425 h1.52 r90
  text "OUT3" at 29.35,59.425 h1.52 r90
  text "DIO 8-15" at 12.675,59.175 h1.52 r90
  text "DIO 24-31" at 33.325,57.25 h1.52 r90
  text "EDGE0" at 31.5,43.6 h1.52 r90
  text "EDGE1" at 34.267,43.6 h1.52 r90
  text "EDGE2" at 37.033,43.6 h1.52 r90
  text "EDGE3" at 39.8,43.6 h1.52 r90
  text "OUT" at 43.707,42.5 h1.52 r90
  text "SDA" at 6.325,34.35 h1 r90
  text "SCL" at 19.9,33.95 h1 r90
  text "BUffered" at 27,29.9 h1.52 r90
  text "IN" at 43.344,28.328 h1.52 r90
  text "DIO 0-7" at 32.158,18.315 h1.52 r90
  text "DIO 8-15" at 34.742,18.315 h1.52 r90
  text "DIO 16-23" at 37.326,18.315 h1.52 r90
  text "DIO 24-31" at 39.91,18.315 h1.52 r90
  text "BANKER VHDCI to EDGE acapter" at 23.993,14.801 h1.52 r90
  text "EDGE2" at 36.925,5.925 h1.52 r90
  text "EDGE0" at 9.7,5.675 h1.52 r90
  text "DIO 0-7" at 12.075,4.4 h1.52 r90
  text "DIO 16-23" at 32.825,4.275 h1.52 r90
Mechanical1:
  lines w0.2: 0,43.8 0,14.5 ; 0,14.5 0,14.5
  lines w0.254: 0,14.5 1.5,14.5 1.5,11.2 1.9,10.8 4.572,10.8 4.572,10.2 1.975,10.2 1.5,9.725 1.5,4.5 0,4.5 0,0 45,0 45,4.5 43.5,4.5 43.5,9.9 43.2,10.2 40.4,10.2 40.4,10.8 43.1,10.8 43.5,11.2 43.5,14.5 45,14.5 45,53.8 45,58.3 43.5,58.3 43.5,63.7 43.4,63.8 43.2,64 40.4,64 40.4,64.6 43.1,64.6 43.5,65 43.5,68.3 45,68.3 45,72.8 0,72.8 0,68.3 1.5,68.3 1.5,65 1.9,64.6 4.6,64.6 4.6,64 1.9,64 1.5,63.6 1.5,58.3 0,58.3 0,43.8

## Text inside footprints (layer, text, board x,y; h text height)
J1: TopOverlay "68" at 7,50.7 h1.2 r270; TopOverlay "1" at 16.6,22.5 h1.2 r270; Mechanical14 "68" at 7,50.7 h1.2 r270; Mechanical14 "1" at 16.6,22.5 h1.2 r270
J4: TopOverlay "1" at 7.125,12.7 h1.2; TopOverlay "5" at 6.825,4.72 h1.2; BottomOverlay "6" at 7.25,13.9 h1.2 r180; BottomOverlay "10" at 6.95,5.92 h1.2 r180
J5: TopOverlay "5" at 37.475,58.7 h1.2; TopOverlay "1" at 37.775,66.68 h1.2; BottomOverlay "10" at 36.6,59.9 h1.2 r180; BottomOverlay "6" at 37.65,67.88 h1.2 r180
J15: TopOverlay "1" at 7.125,66.5 h1.2; TopOverlay "5" at 6.825,58.52 h1.2; BottomOverlay "6" at 7.25,67.7 h1.2 r180; BottomOverlay "10" at 6.95,59.72 h1.2 r180
J16: TopOverlay "5" at 37.475,4.9 h1.2; TopOverlay "1" at 37.775,12.88 h1.2; BottomOverlay "10" at 36.6,6.1 h1.2 r180; BottomOverlay "6" at 37.65,14.08 h1.2 r180
SW1: TopOverlay "4" at 38.629,34.733 h1; TopOverlay "3" at 36.089,34.733 h1; TopOverlay "ON" at 30.501,39.178 h1; TopOverlay "2" at 33.549,34.733 h1; TopOverlay "1" at 31.263,34.733 h1; Mechanical14 "4" at 38.629,34.733 h1; Mechanical14 "3" at 36.089,34.733 h1; Mechanical14 "ON" at 30.501,39.178 h1; Mechanical14 "2" at 33.549,34.733 h1; Mechanical14 "1" at 31.263,34.733 h1